# Altium PCB PCB_ISO7221+ULN2003.PcbDoc
Units mil, origin at the board's own origin, x right, y up, seen from the top; angles counter-clockwise.
Board outline not stored, 2 copper layers (Top Layer, Bottom Layer); 10 components, 0 nets, 52 pads, 15 vias.
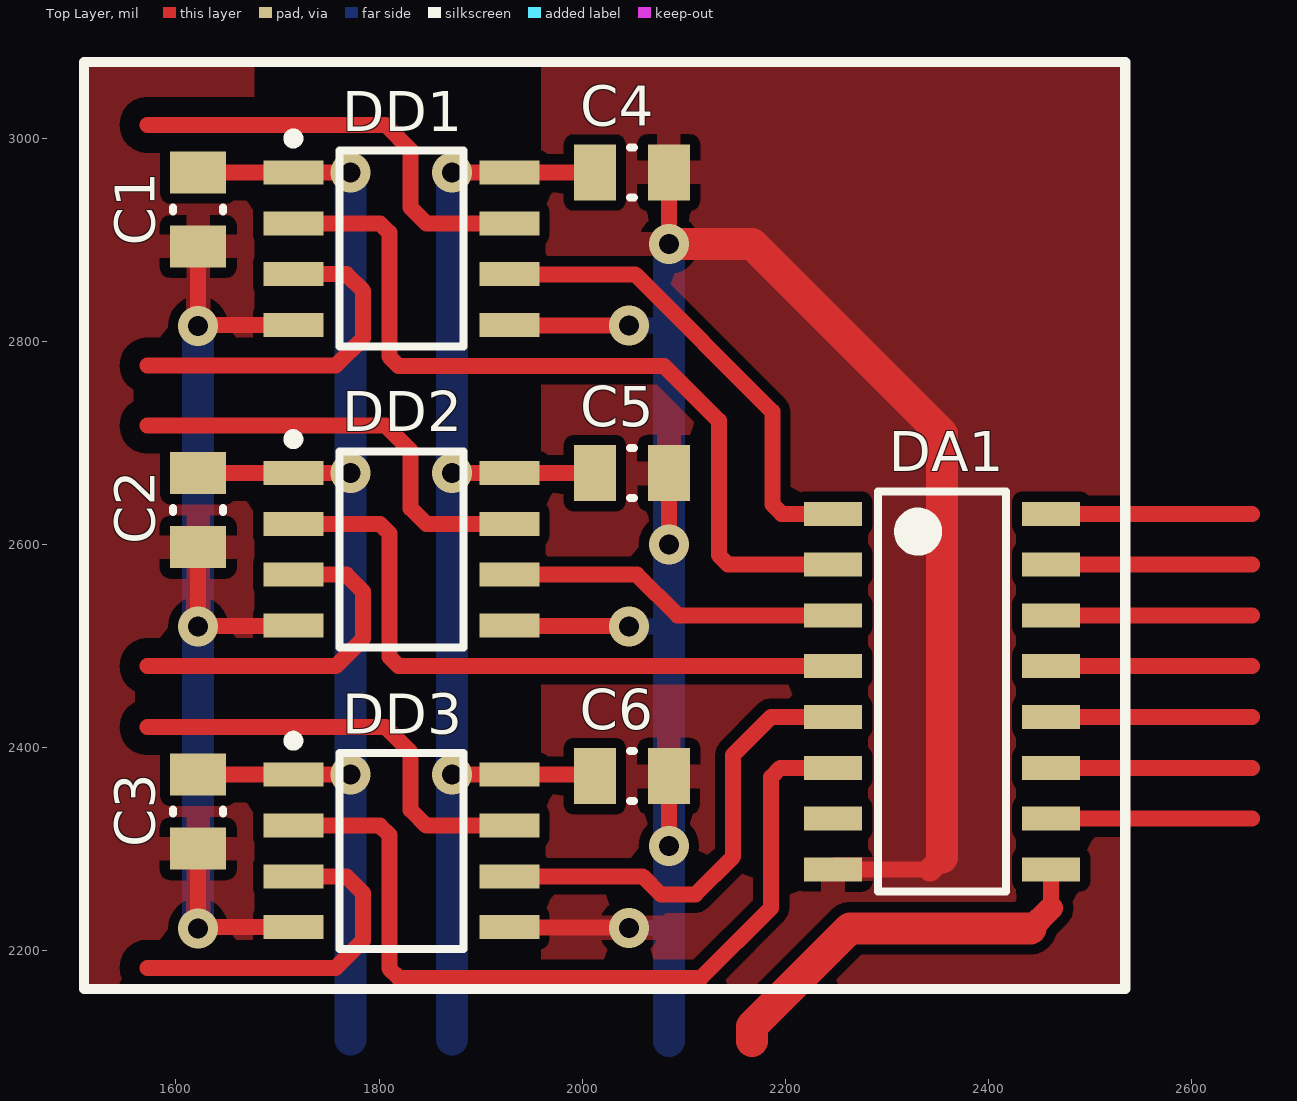
[diagram p0: Top Layer view]
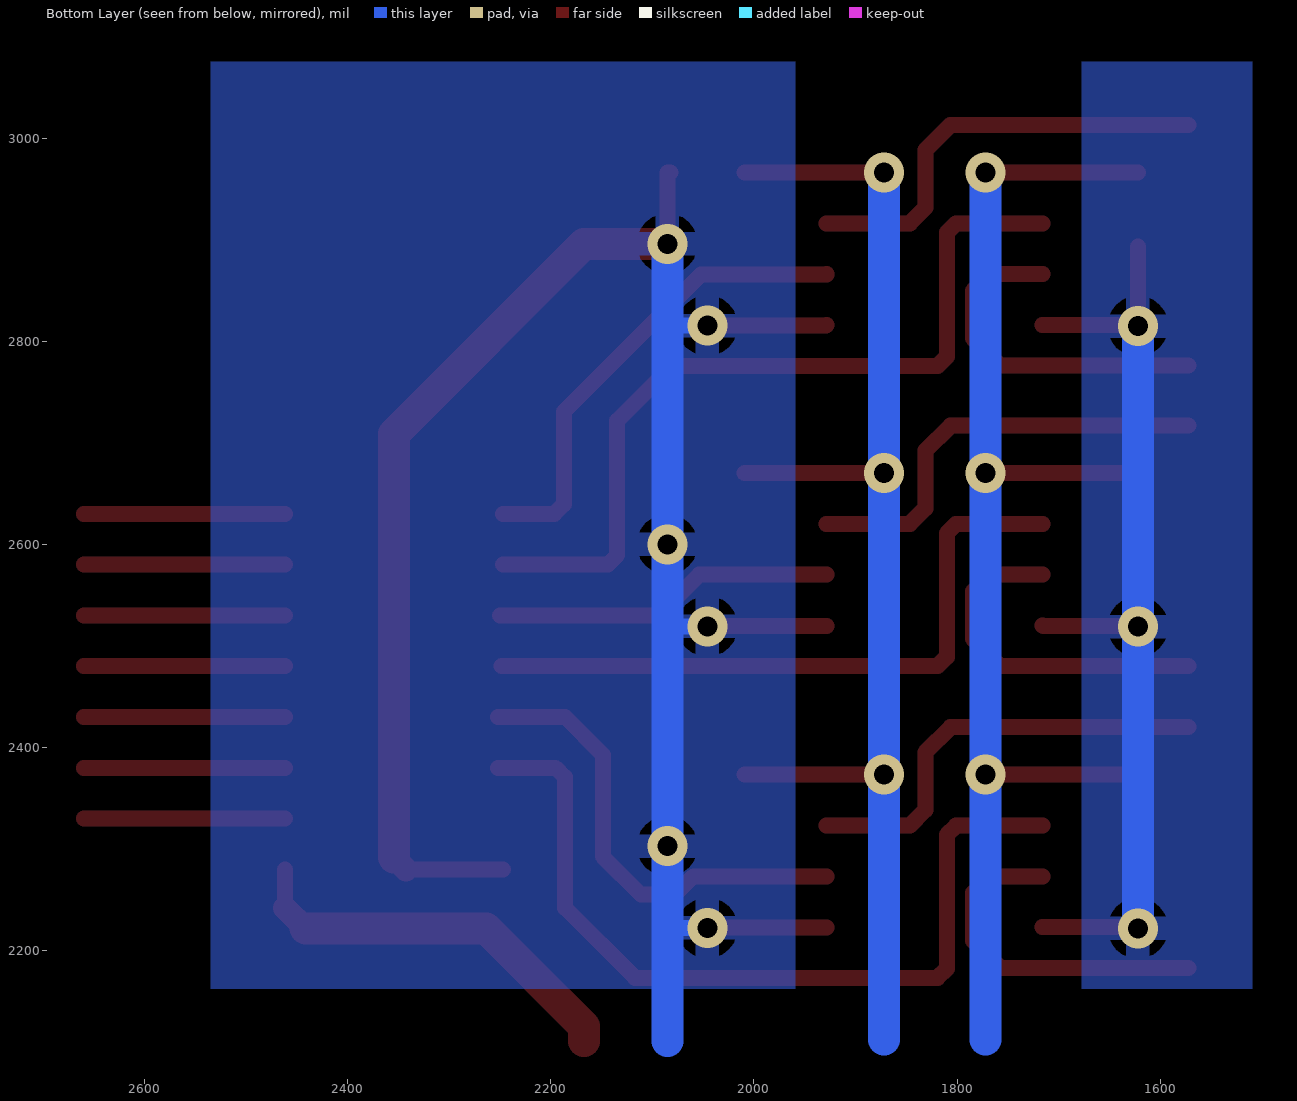
[diagram p1: Bottom Layer view, seen from below]

## Layer stack, top to bottom
Top Solder: solder mask 0.4, Solder Resist, Dk 3.5
Top Layer: signal copper 1.4
Dielectric 1: dielectric 12.6, FR-4, Dk 4.8
Bottom Layer: signal copper 1.4
Bottom Solder: solder mask 0.4, Solder Resist, Dk 3.5

## Components (designator, comment, footprint, x,y, rotation, side; value= is the part's Value field where it differs from the comment)
C1 "100n" CAPACITOR_0805 1621.95,2929.69 r270 top
C2 "100n" CAPACITOR_0805 1621.95,2633.76 r270 top
C3 "100n" CAPACITOR_0805 1621.95,2336.91 r270 top
C4 "100n" CAPACITOR_0805 2048.77,2966.1 r0 top
C5 "100n" CAPACITOR_0805 2048.77,2670.18 r0 top
C6 "100n" CAPACITOR_0805 2048.77,2371.85 r0 top
DA1 "ULN2003" MCP3208_SOIC16 2354.23,2455.19 r0 top
DD1 "ISO7221" ISO7221 1821.95,2891.1 r0 top
DD2 "ISO7221" ISO7221 1821.95,2595.18 r0 top
DD3 "ISO7221" ISO7221 1821.95,2298.33 r0 top

## Footprints (in the part's own frame and the unit in brackets; to place one, negate y for a bottom-side part, rotate by r counter-clockwise, add the part's x,y. Pads: shape width x height; smd on the part's side, far side on the other; paste and mask are expansions set on the pad)
CAPACITOR_0805 [mm]
  rect 1.05x1.4 smd: 1(-0.925,0) 2(0.925,0)
  silkscreen extent -0.05,-0.63 0.05,0.63, body extent -1,-0.63 1,0.63, height 1.3
ISO7221 [mm] "SOIC, 8-Leads, Body 4,90x3,90mm, Pitch 1,27mm, IPC Medium Density"
  rect 1.5x0.6 smd: 1(-2.7,1.905) 2(-2.7,0.635) 3(-2.7,-0.635) 4(-2.7,-1.905) 5(2.7,-1.905) 6(2.7,-0.635) 7(2.7,0.635) 8(2.7,1.905)
  silkscreen extent -2.82,-2.45 1.55,2.88, body extent -3.1,-2.5 3.1,2.5, height 1.76
MCP3208_SOIC16 [mm] "SOIC, 16-Leads, Body 9,91x3,90mm, Pitch 1,27mm, IPC Medium Density"
  rect 1.45x0.6 smd: 1(-2.725,4.445) 2(-2.725,3.175) 3(-2.725,1.905) 4(-2.725,0.635) 5(-2.725,-0.635) 6(-2.725,-1.905) 7(-2.725,-3.175) 8(-2.725,-4.445) 9(2.725,-4.445) 10(2.725,-3.175) 11(2.725,-1.905) 12(2.725,-0.635) 13(2.725,0.635) 14(2.725,1.905) 15(2.725,3.175) 16(2.725,4.445)
  silkscreen extent -1.6,-5 1.6,5, body extent -3,-5.08 3,5.08, height 1.7

## Part data
C1 C2 C3 C4 C5 C6: library part Capacitor_0805

## Via types
v1: diameter 39.37, hole 19.68, Top Layer to Bottom Layer, 15 vias

## Nets (pads, with @x,y where several pads share a name; then routed paths per layer and width w, separated by ;. In a path a pad name is that pad's centre, name@x,y a point inside that pad or via, vN(x,y) a via of type N, cw(c..) or ccw(c..) an arc to the next point about the centre after c; other vN are vias at no path point)
pads on no net: C1.1 C1.2 C2.1 C2.2 C3.1 C3.2 C4.1 C4.2 C5.1 C5.2 C6.1 C6.2 DA1.1 DA1.2 DA1.3 DA1.4 DA1.5 DA1.6 DA1.7 DA1.8 DA1.9 DA1.10 DA1.11 DA1.12 DA1.13 DA1.14 DA1.15 DA1.16 DD1.1 DD1.2 DD1.3 DD1.4 DD1.5 DD1.6 DD1.7 DD1.8 DD2.1 DD2.2 DD2.3 DD2.4 DD2.5 DD2.6 DD2.7 DD2.8 DD3.1 DD3.2 DD3.3 DD3.4 DD3.5 DD3.6 DD3.7 DD3.8
copper on no net: | length 13702.1
  Top Layer w15.75: 1571.95,2183.34 1757.32,2183.34 1784.33,2210.35 1784.33,2256.79 1767.79,2273.33 1715.65,2273.33 ; 1571.95,2420.18 1806.4,2420.18 1831.17,2395.4 1831.17,2338.64 1846.49,2323.33 1928.25,2323.33 ; 1571.95,2480.19 1757.32,2480.19 1784.33,2507.2 1784.33,2553.64 1767.79,2570.18 1715.65,2570.18 ; 1571.95,2717.03 1806.4,2717.03 1831.17,2692.25 1831.17,2635.49 1846.49,2620.18 1928.25,2620.18 ; 1571.95,2776.11 1757.32,2776.11 1784.33,2803.12 1784.33,2849.57 1767.79,2866.1 1715.65,2866.1 ; 1571.95,3012.95 1806.4,3012.95 1831.17,2988.18 1831.17,2931.42 1846.49,2916.1 1928.25,2916.1 ; 1621.95,2300.49 1621.95,2223.33 1715.65,2223.33 ; 1621.95,2373.33 1715.65,2373.33 v1(1771.95,2373.33) ; 1621.95,2597.34 v1(1621.95,2519.06) 1622.51,2519.62 1715.09,2519.62 1715.65,2520.18 ; 1621.95,2670.18 1715.65,2670.18 v1(1771.95,2670.18) ; v1(1621.95,2814.98) v1@1621.95,2816.1 ; 1621.95,2893.27 v1@1621.95,2816.1 ; 1621.95,2966.1 1715.65,2966.1 v1(1771.95,2966.1) ; 1715.65,2323.33 1800.85,2323.33 1810.07,2314.1 1810.07,2182.55 1819.3,2173.33 2116.88,2173.33 2185.85,2242.3 2185.85,2370.96 2195.08,2380.19 2246.95,2380.19 2251.77,2380.19 ; 1715.65,2620.18 1800.85,2620.18 1810.07,2610.95 1810.07,2489.41 1819.3,2480.19 2246.95,2480.19 2248.34,2480.19 ; 1715.65,2816.1 v1@1621.95,2816.1 ; 1715.65,2916.1 1800.85,2916.1 1810.07,2906.88 1810.07,2784.79 1819.3,2775.57 2080.68,2775.57 2134.45,2721.8 2134.45,2589.41 2143.67,2580.19 2246.95,2580.19 ; v1(1871.95,2373.33) 1928.25,2373.33 2009.4,2373.33 ; v1(1871.95,2670.18) 1928.25,2670.18 2009.4,2670.18 ; v1(1871.95,2966.1) 1928.25,2966.1 2009.4,2966.1 ; 1928.25,2273.33 2059.44,2273.33 2077.31,2255.46 2111.26,2255.46 2148.58,2292.77 2148.58,2392.91 2185.85,2430.19 2246.95,2430.19 2251.57,2430.19 ; 1928.25,2570.18 2053.79,2570.18 2093.77,2530.19 2246.95,2530.19 2249.92,2530.19 ; 1928.25,2816.1 1928.99,2815.36 v1(2045.81,2815.36) ; 1928.25,2866.1 1928.63,2865.72 2051.96,2865.72 2187.03,2730.65 2187.03,2639.41 2196.26,2630.19 2246.95,2630.19 ; 1928.62,2222.96 v1@2045.81,2222.96 ; 1928.62,2519.81 v1@2038.17,2519.81 ; 2082.23,2966.1 2085.18,2966.1 ; v1@2083.71,2304.62 v1(2085.18,2303.14) ; v1@2083.71,2601.47 v1(2085.18,2599.99) ; v1@2083.71,2897.39 v1(2085.18,2895.91) v1@2086.66,2897.39 ; v1@2085.18,2304.62 2085.18,2371.85 ; v1@2085.18,2601.47 2085.18,2668.7 ; v1@2085.18,2897.39 2085.18,2964.63 ; 2246.95,2280.19 2342.42,2280.19 ; 2461.52,2242.3 2461.52,2280.19 ; 2461.52,2330.19 2659.45,2330.19 ; 2461.52,2380.19 2659.45,2380.19 ; 2461.52,2430.19 2659.45,2430.19 ; 2461.52,2480.19 2659.45,2480.19 ; 2461.52,2530.19 2659.45,2530.19 ; 2461.52,2580.19 2659.45,2580.19 ; 2461.52,2630.19 2659.45,2630.19
  Top Layer w23.62: 2342.42,2280.19 2354.23,2292 ; 2441.42,2222.21 2461.52,2242.3
  Top Layer w31.5: v1@2086.66,2897.39 2088.14,2895.91 2167.14,2895.91 2354.23,2708.82 2354.23,2292 ; 2167.14,2111.38 2167.14,2125.72 2263.63,2222.21 2441.42,2222.21
  Bottom Layer w15.75: v1(2045.81,2222.58) 2082.23,2222.58 2083.71,2224.06 ; v1(2045.81,2519.43) 2082.23,2519.43 2083.71,2520.91 ; v1(2045.81,2815.36) 2082.23,2815.36 2083.71,2816.83
  Bottom Layer w31.5: v1(1621.95,2222.21) v1(1621.95,2519.06) v1(1621.95,2814.98) ; 1771.95,2112.5 v1(1771.95,2373.33) v1(1771.95,2670.18) v1(1771.95,2966.1) ; 1871.95,2112.5 v1(1871.95,2373.33) v1(1871.95,2670.18) v1(1871.95,2966.1) ; 2085.18,2111.38 v1(2085.18,2303.14) v1@2085.18,2304.62 ; v1@2085.18,2306.09 v1(2085.18,2599.99) v1(2085.18,2895.91)

## Polygon pours and split planes (outlines as drawn)
no net on Top Layer "GND_L01_P020" (solid, pour order 20): 1509.45,3075 1746.95,3075 1746.95,2162.5 1509.45,2162.5
no net on Top Layer "GNDI_L01_P019" (solid, pour order 19): 1959.45,3075 2534.45,3075 2534.45,2162.5 1959.45,2162.5
no net on Bottom Layer "GND_L02_P016" (solid, pour order 16): 1509.45,3075 1746.95,3075 1746.95,2162.5 1509.45,2162.5
no net on Bottom Layer "GNDI_L02_P015" (solid, pour order 15): 1959.45,3075 2534.45,3075 2534.45,2162.5 1959.45,2162.5

## Other copper
Top Layer:
  pour cut-out: 1959.45,3075 1959.45,2162.5 1677.26,2162.5 1677.26,3075
Bottom Layer:
  pour cut-out: 1959.45,3075 1959.45,2162.5 1677.26,2162.5 1677.26,3075

## Silkscreen, mask and mechanical layers (free items; w line width, h text height)
Top Overlay:
  lines w10: 1509.45,2162.5 2534.45,2162.5 2534.45,3075 1509.45,3075 1509.45,2162.5